# Altium PCB voltage regulator.PcbDoc
Units mil, origin at the board's own origin, x right, y up, seen from the top; angles counter-clockwise.
Board outline 1680 x 680 mil, 2 copper layers (Top Layer, Bottom Layer); 16 components, 9 nets, 40 pads, 16 vias.
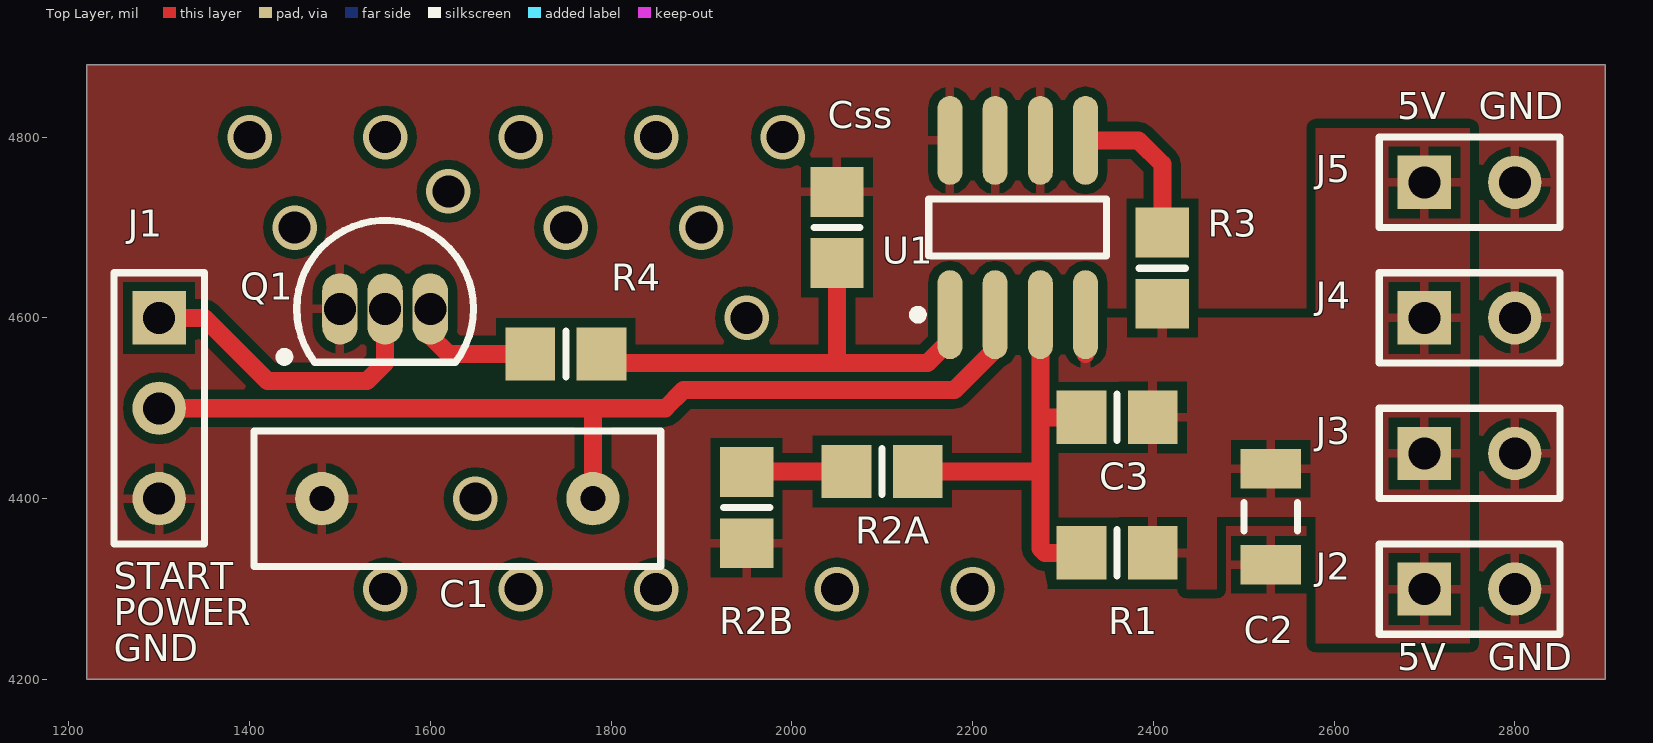
[diagram p0: Top Layer view]
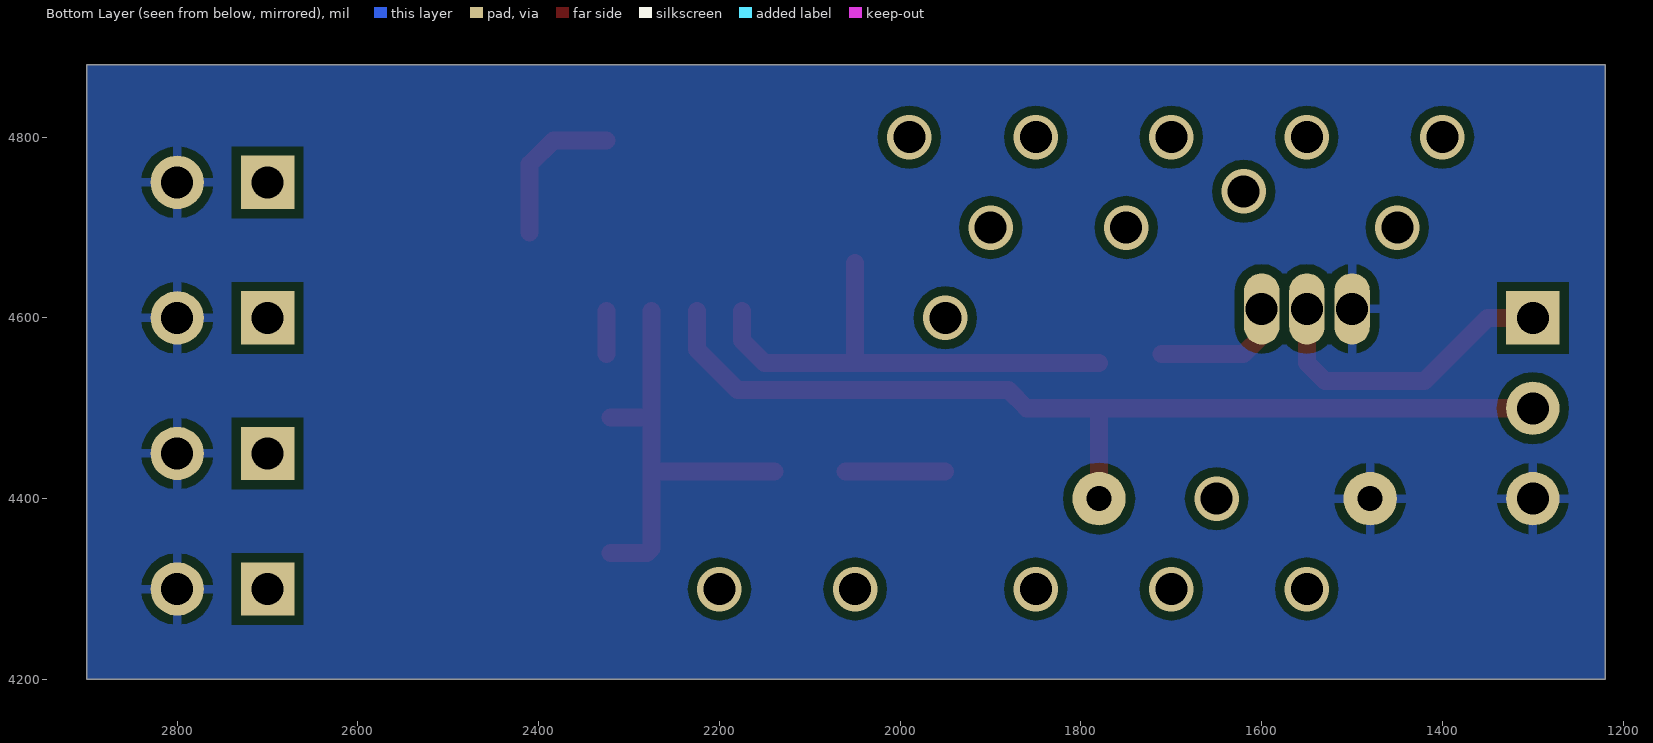
[diagram p1: Bottom Layer view, seen from below]

## Layer stack, top to bottom
Top Layer: signal copper 1.4
Dielectric: dielectric 12.6, FR-4, Dk 4.8
Bottom Layer: signal copper 1.4

## Board outline
1220,4880 2900,4880 2900,4200 1220,4200 1220,4880

## Design rules (kind name [scope] priority, off if disabled: settings)
Clearance [All] p1: gap=10
PolygonConnect [All] p1: connectstyle=Relief reliefconductorwidth=10 reliefentries=4 polygonreliefangle="90 Angle" airgapwidth=10
RoutingVias [All] p1: holewidth=28 width=50 viastyle="Through Hole" minholewidth=28 minwidth=50 maxholewidth=28 maxwidth=50
SolderMaskExpansion [All] p1: expansion=4
Width [All] p1: maxlimit=20 minlimit=10 preferedwidth=10
28 further rules are at their usual default settings.

## Components (designator, comment, footprint, x,y, rotation, side; value= is the part's Value field where it differs from the comment)
C1 "Electrolytic" RAD-0.3 1630,4400 r180 top
C2 "20% tantalum" C1206 2530,4380 r90 top
C3 "10%" 6-0805_M 2360,4490 r0 top
Css "10%, 10 nF, 16 V (min)" 6-0805_M 2050,4700 r270 top
J1 "Header 3" HDR1X3 1300,4600 r270 top
J2 "Header 2" HDR1X2 2700,4300 r0 top
J3 "Header 2" HDR1X2 2700,4450 r0 top
J4 "Header 2" HDR1X2 2700,4600 r0 top
J5 "Header 2" HDR1X2 2700,4750 r0 top
Q1 "2N3904" TO-92A 1550,4610 r270 top
R1 "1%" 6-0805_M 2360,4340 r0 top
R2A "1%" 6-0805_M 2100,4430 r0 top
R2B "1%" 6-0805_M 1950,4390 r90 top
R3 "1%" 6-0805_M 2410,4655 r270 top
R4 "1%" 6-0805_M 1750,4560 r0 top
U1 "L6933H1.2" SO8_M 2250,4700 r90 top

## Footprints (in the part's own frame and the unit in brackets; to place one, negate y for a bottom-side part, rotate by r counter-clockwise, add the part's x,y. Pads: shape width x height; smd on the part's side, far side on the other; paste and mask are expansions set on the pad)
6-0805_M [mm] "Chip Resistor, Body 2.0x1.2mm, IPC Low Density"
  rect 1.4x1.5 smd: 1(-1,0) 2(1,0)
  silkscreen extent 0,-0.65 0,0.65, body extent -1.07,-0.7 1.07,0.7, height 0.7
C1206 [mm] "Chip Capacitor, Body 3.2x1.6mm, IPC High Density"
  rect 1.1x1.7 smd: 1(-1.35,0) 2(1.35,0)
  silkscreen extent -0.4,-0.75 0.4,0.75, body extent -1.7,-0.9 1.7,0.9, height 1.3
HDR1X2 [mm] "Connector; Header; 2 Position"
  rect 1.5x1.5 hole 0.9: 1(0,0)
  round 1.5 hole 0.9: 2(2.54,0)
  silkscreen extent -1.27,-1.27 3.81,1.27
HDR1X3 [mm] "Connector; Header; 3 Position"
  rect 1.5x1.5 hole 0.9: 1(0,0)
  round 1.5 hole 0.9: 2(2.54,0) 3(5.08,0)
  silkscreen extent -1.27,-1.27 6.35,1.27
RAD-0.3 [mm] "Radial Cap, Thru-Hole; 2 Leads; 0.3 in Pin Spacing"
  round 1.5 hole 0.7: 1(-3.81,0) 2(3.81,0)
  silkscreen extent -5.71,-1.91 5.71,1.91
SO8_M [mm] "SOIC, 8-Leads, Body 4.9x3.9mm, Pitch 1.27mm, IPC Low Density"
  oval 2.5x0.7 smd: 1(-2.45,1.905) 2(-2.45,0.635) 3(-2.45,-0.635) 4(-2.45,-1.905) 5(2.45,-1.905) 6(2.45,-0.635) 7(2.45,0.635) 8(2.45,1.905)
  silkscreen extent -2.57,-2.5 0.8,2.93, body extent -2,-2.5 2,2.5, height 1.75
TO-92A [mm] "TO, Flat Index; 3 In-Line, Axial Leads; Body Dia. 4.5mm; Leads 0.51 x 0.48 mm (max)"
  oval 2x1 hole 0.9: 1(0,-1.27) 2(0,0) 3(0,1.27)
  silkscreen extent -2.48,-2.95 1.5,2.48, body extent -2.5,-2.5 1.5,2.5, height 6.86

## Part data
C1: library part "Cap Pol1", "Polarized Capacitor (Radial)"
C2 C3 Css: library part Cap, "Capacitor"
J1: "Header, 3-Pin"
J2 J3 J4 J5: "Header, 2-Pin"
Q1: "NPN General Purpose Amplifier"
R1 R2A R2B R3 R4: library part Res1, "Resistor"
U1: library part CMP-0240-00057-1, "High Performance 2A ULDO Linear Regulator with Soft Start, 8-Pin SO"

## Via types
v1: diameter 49.21, hole 35.43, Top Layer to Bottom Layer, 16 vias

## Nets (pads, with @x,y where several pads share a name; then routed paths per layer and width w, separated by ;. In a path a pad name is that pad's centre, name@x,y a point inside that pad or via, vN(x,y) a via of type N, cw(c..) or ccw(c..) an arc to the next point about the centre after c; other vN are vias at no path point)
GND: C1.2 C2.1 Css.1 J1.3 J2.2 J3.2 J4.2 J5.2 Q1.1 R2B.1 U1.6 U1.7 U1.8
NetC3_1: C3.1 R1.1 R2A.2 U1.3 | length 491.4
  Top Layer w20: R2A.2 2275,4430 ; U1.3@2275,4607.48 2275,4490 ; R1.1 2280,4340 2275,4345 2275,4430 ; C3.1 2275,4490 ; 2275,4430 2275,4490
NetCss_2: Css.2 R4.2 U1.1 | length 538.5
  Top Layer w20: R4.2@1780,4550 2150,4550 2175,4575 U1.1@2175,4607.48 ; 2050,4560 Css.2
NetQ1_3: Q1.3 R4.1 | length 148.9
  Top Layer w20: Q1.3 1600,4580 1620,4560 R4.1
NetR2A_1: R2A.1 R2B.2 | length 110
  Top Layer w20: R2B.2@1950.63,4430 R2A.1
NetR3_1: R3.1 U1.5 | length 171.6
  Top Layer w20: U1.5 2383.54,4796.46 2410,4770 R3.1
START: J1.1 Q1.2 | length 347.3
  Top Layer w20: J1.1 1350,4600 1420,4530 1530,4530 1550,4550 Q1.2
VBATTERY: C1.1 J1.2 U1.2 | length 1094.4
  Top Layer w20: J1.2 1780,4500 ; C1.1 1780,4500 ; U1.2@2225,4607.48 2225,4565 2180,4520 1880,4520 1860,4500 1780,4500
VOUT: C2.2 C3.2 J2.1 J3.1 J4.1 J5.1 R1.2 R3.2 U1.4 | length 47.5
  Top Layer w20: U1.4@2325,4560 U1.4@2325,4607.48
copper on no net:
  other v1: 1550,4300 1700,4300 1850,4300 2050,4300 2200,4300 1650,4400 1950,4600 1450,4700 1750,4700 1900,4700 1620,4740 1400,4800 1550,4800 1700,4800 1850,4800 1990,4800

## Polygon pours and split planes (outlines as drawn)
GND on Bottom Layer "GND" (solid, remove dead copper, pour order 6): 1220,4880 2900,4880 2900,4200 1220,4200
VOUT on Top Layer "Vout" (solid, remove dead copper, pour order 11): 2290,4310 2290,4600 2580,4600 2580,4810 2750,4810 2750,4240 2580,4240 2580,4380 2470,4380 2470,4300 2290,4300 2290,4330
GND on Top Layer "GND" (solid, remove dead copper, pour order 13): 1220,4880 2900,4880 2900,4200 1220,4200 1220,4880

## Silkscreen, mask and mechanical layers (free items; w line width, h text height)
Top Overlay:
  text "5V" at 2670,4820 h30
  text "GND" at 2760,4820 h30
  text "START" at 1250,4300 h30
  text "POWER" at 1250,4260 h30
  text "GND" at 1250,4220 h30
  text "5V" at 2670,4210 h30
  text "GND" at 2770,4210 h30